# Altium PCB PCB1.PcbDoc
Units mm, origin at the board's own origin, x right, y up, seen from the top; angles counter-clockwise.
Board outline 99.06 x 38.1 mm, 2 copper layers (Top Layer, Bottom Layer); 9 components, 6 nets, 23 pads, 0 vias.
Unrouted connection lines stored in the file: 3.
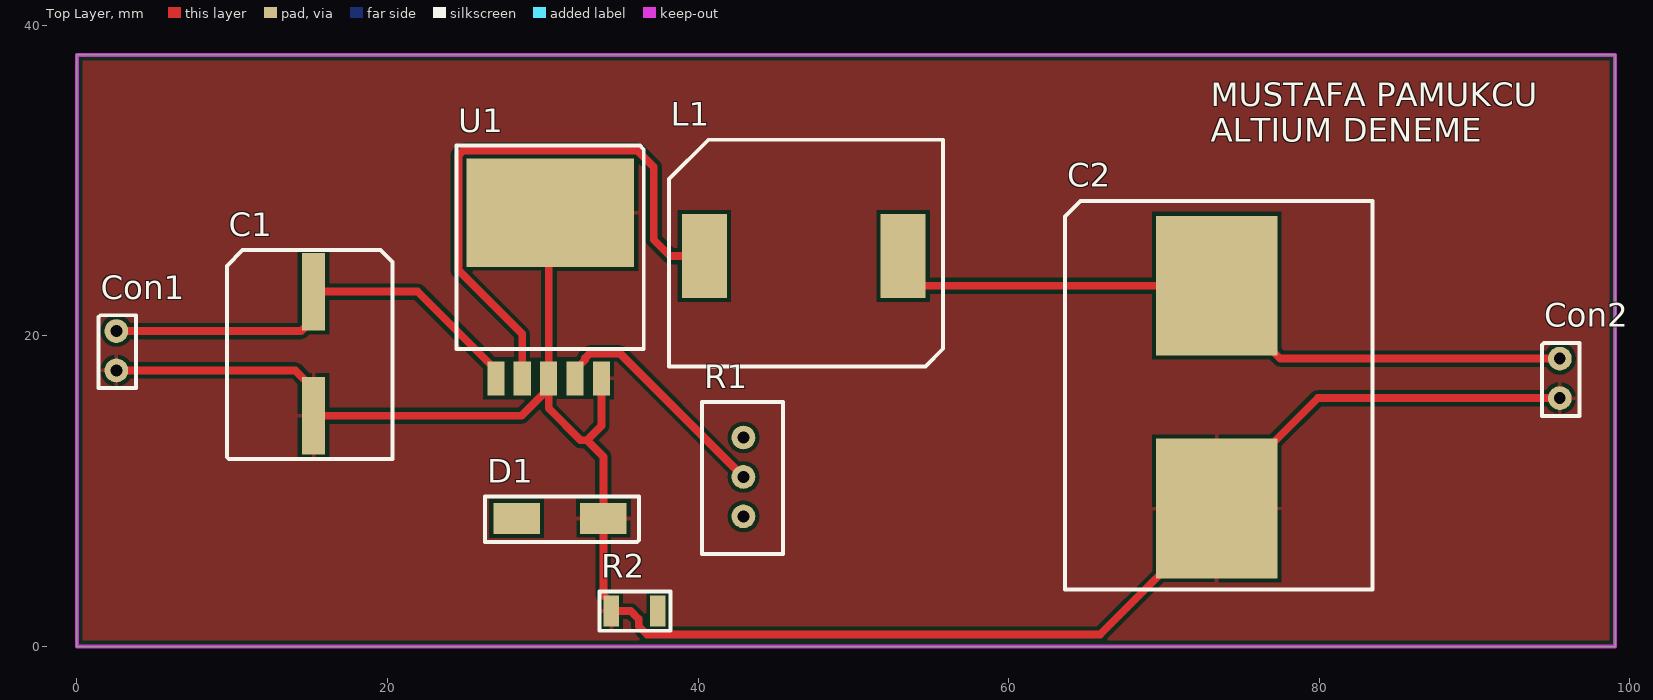
[diagram p0: Top Layer view]
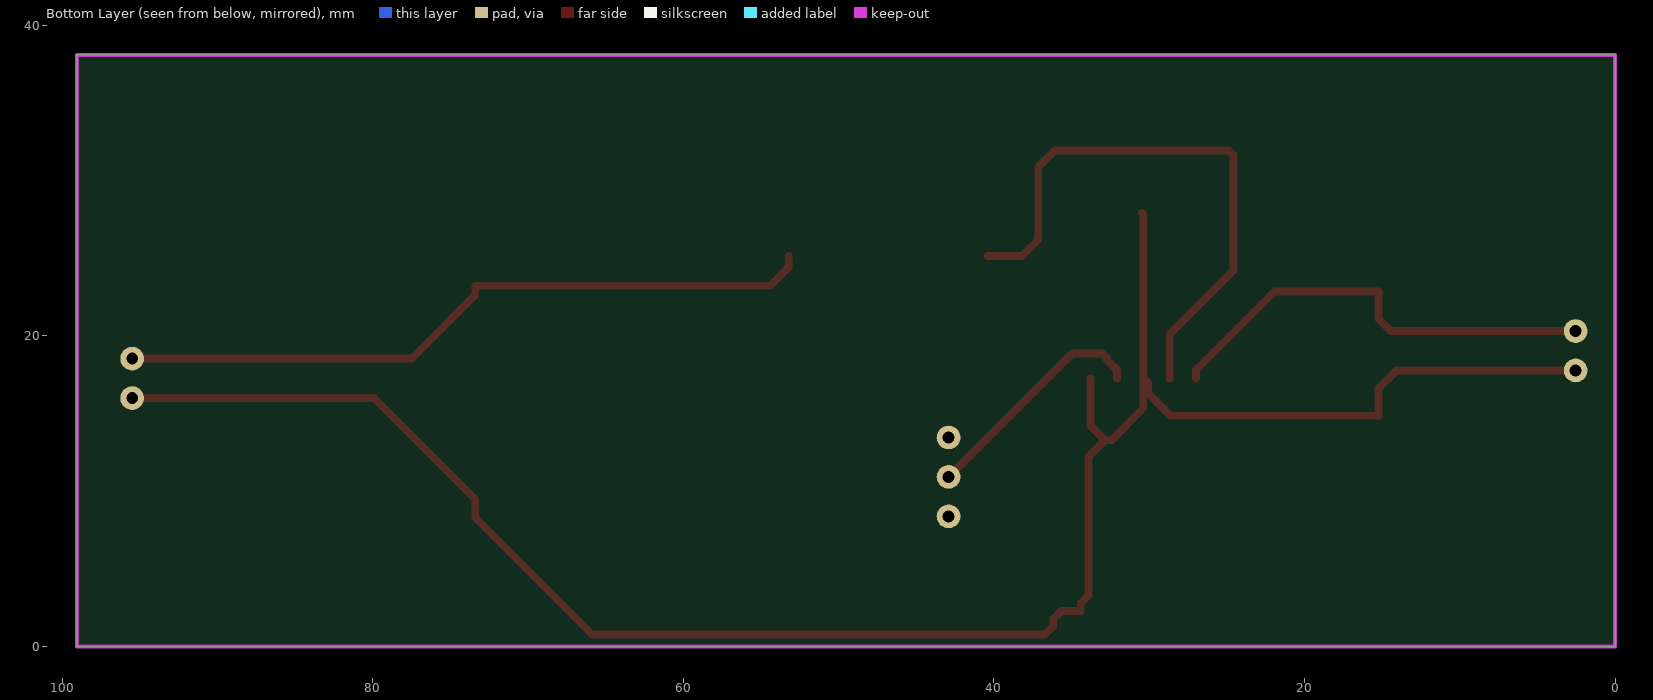
[diagram p1: Bottom Layer view, seen from below]
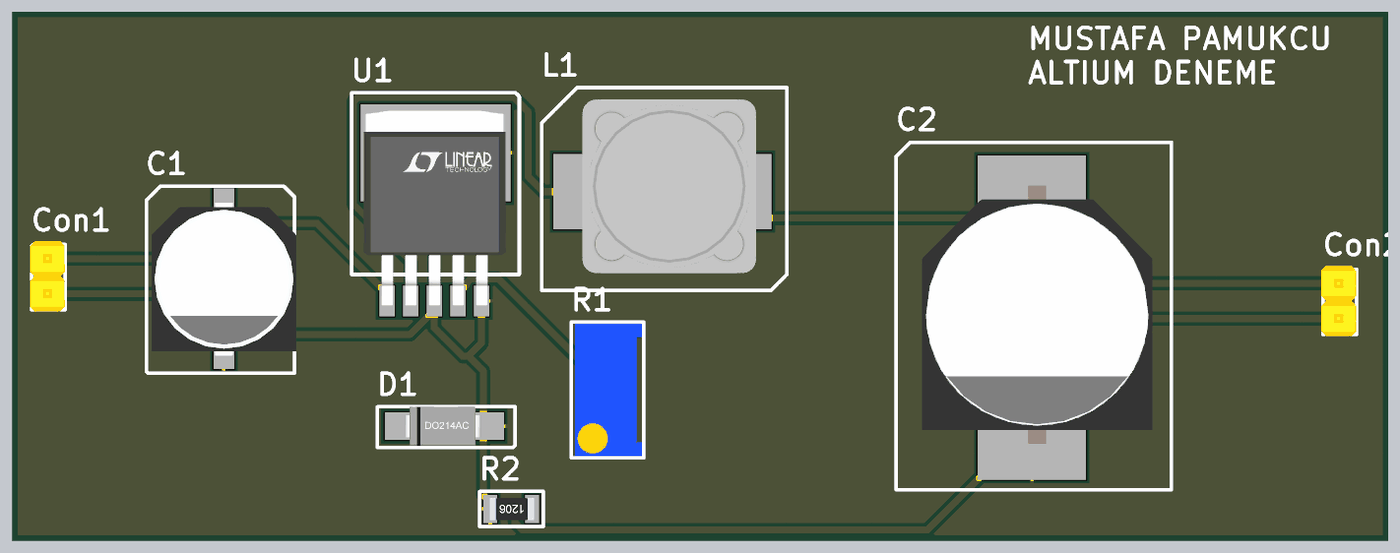
[diagram p2: 3D render of the assembled board from above, using the file's embedded part models]

## Layer stack, top to bottom
Top Solder: solder mask 0.0102, Solder Resist, Dk 3.5
Top Layer: signal copper 0.0356
Dielectric 1: dielectric 0.32, FR-4, Dk 4.8
Bottom Layer: signal copper 0.0356
Bottom Solder: solder mask 0.0102, Solder Resist, Dk 3.5

## Board outline
0,0 0,38.1 99.06,38.1 99.06,0

## Design rules (kind name [scope] priority, off if disabled: settings)
Clearance [All] p1: gap=0.254 ignorepadtopadclearanceinfootprint=FALSE except(0: Arc-Hole Track-Hole SMDPad-Hole THPad-Hole Via-Hole Fill-Hole Poly-Hole Region-Hole Text-Hole)
PolygonConnect [All] p1: connectstyle=Relief reliefconductorwidth=0.254 reliefentries=4 polygonreliefangle="90 Angle" airgapwidth=0.254
RoutingVias [All] p1: holewidth=0.711 width=1.27 viastyle="Through Hole" minholewidth=0.711 minwidth=1.27 maxholewidth=0.711 maxwidth=1.27
SolderMaskExpansion [All] p1: expansion=0.102 istentingtop=FALSE
Width [All] p1: maxlimit=1 minlimit=0.254 preferedwidth=0.5
30 further rules are at their usual default settings.

## Components (designator, comment, footprint, x,y, rotation, side; value= is the part's Value field where it differs from the comment)
C1 "200uF" "220uF Capacitor" 15.24,22.86 r0 top
C2 "1000uF" "1000Uf Cap" 73.406,23.241 r0 top
Con1 "2pinconnector" 2pin 2.54,20.32 r0 top
Con2 "2pinconnector" 2pin 95.504,18.542 r0 top
D1 "1N5822" 1n5822 28.321,8.255 r0 top
L1 "150uH" "150uH Inductor" 40.413,25.146 r0 top
R1 "10K" "10K Pot" 42.926,10.922 r0 top
R2 "1K" "1K 1206 Res" 34.417,2.286 r0 top
U1 "LM2576" LM2576-TO63-5 26.98,17.27 r90 top

## Footprints (in the part's own frame and the unit in brackets; to place one, negate y for a bottom-side part, rotate by r counter-clockwise, add the part's x,y. Pads: shape width x height; smd on the part's side, far side on the other; paste and mask are expansions set on the pad)
"1K 1206 Res" [mm]
  rect 1x2 smd: 1(0,0) 2(3,0)
  silkscreen extent -0.76,-1.27 3.81,1.27, body extent -0.04,-0.8 3.16,0.8, height 0.56
1n5822 [mm]
  rect 3x2 smd: 1(0,0) 2(5.588,0)
  silkscreen extent -2.03,-1.52 7.87,1.4, body extent -0.08,-1.4 5.41,1.4, height 2.3
2pin [mil]
  round 60 hole 30: 1(0,0) 2(0,-100)
  silkscreen extent -45,-145 50,40, body extent -50,-150 50,50, height 374
"10K Pot" [mil]
  round 60 hole 30: 1(0,100) 2(0,0) 3(0,-100)
  silkscreen extent -105,-195 100,190, body extent -94,-190 94,185, height 455
"150uH Inductor" [mm]
  rect 2.9x5.4 smd: 1(0,0) 2(12.8,0)
  silkscreen extent -2.29,-7.11 15.37,7.49, body extent 0.64,-5.87 13.14,6.63, height 7.51
"220uF Capacitor" [mm]
  rect 1.5x5 smd: 1(0,0) 2(0,-8.001)
  silkscreen extent -5.59,-10.79 5.08,2.67, body extent -5.19,-9.53 5.21,1.47, height 10.41
"1000Uf Cap" [mm]
  rect 7.8x9 smd: 1(0,0) 2(0,-14.351)
  silkscreen extent -9.78,-19.56 10.03,5.46, body extent -7.92,-16.26 8.68,2.34, height 17.51
LM2576-TO63-5 [mm] "D2-PAK, 6-Pads, Body 7,42x8,51mm (max), IPC Medium Density"
  rect 2.2x1.1 smd: 1(0,0) 2(0,-1.7) 3(0,-3.4) 4(0,-5.1) 5(0,-6.8)
  rect 7x10.8 smd: 3(10.67,-3.5)
  silkscreen extent 1.91,-9.53 14.99,2.54, body extent -0.33,-8.54 13.72,1.68, height 4.38

## Part data
C1: library part "Electrolytic Cap 220uF"
C2: library part "Electrolytic Cap"
L1: library part "150uH L"
R1: library part "Variable Resistor"
R2: library part Resistor

## Nets (pads, with @x,y where several pads share a name; then routed paths per layer and width w, separated by ;. In a path a pad name is that pad's centre, name@x,y a point inside that pad or via, vN(x,y) a via of type N, cw(c..) or ccw(c..) an arc to the next point about the centre after c; other vN are vias at no path point)
GND: C1.2 C2.2 Con1.2 Con2.2 D1.2 R2.1 U1.3 U1.5 | length 132.4
  Top Layer w0.5: Con1.2 14.069,17.78 15.24,16.609 C1.2 28.632,14.859 30.08,16.307 30.08,16.97 U1.3@30.38,17.27 ; U1.3@30.48,27.94 30.38,27.84 U1.3@30.38,17.27 ; U1.5 33.78,14.222 32.846,13.288 ; Con2.2 79.918,16.002 73.406,9.49 C2.2 73.406,8.29 65.898,0.782 36.708,0.782 36.188,1.303 36.188,1.765 35.667,2.286 R2.1 34.417,2.786 33.909,3.294 D1.2 33.909,12.225 32.846,13.288 ; U1.3@30.38,17.27 30.38,15.34 32.432,13.288 32.846,13.288
NetC1_1: C1.1 Con1.1 U1.1 | length 29.2
  Top Layer w0.5: Con1.1 14.45,20.32 15.24,21.11 C1.1 21.94,22.86 26.98,17.82 U1.1
NetC2_1: C2.1 Con2.1 L1.2 R1.1 | length 45.8
  Top Layer w0.5: L1.2 53.213,24.441 54.413,23.241 C2.1 73.406,22.641 77.505,18.542 Con2.1
NetD1_1: D1.1 L1.1 U1.2 | length 37.6
  Top Layer w0.5: U1.2 28.68,20.127 24.576,24.231 24.576,31.649 24.871,31.944 36.089,31.944 37.151,30.882 37.151,26.208 38.213,25.146 L1.1
NetR1_2: R1.2 U1.4 | length 15.2
  Top Layer w0.5: U1.4 32.08,17.82 32.726,18.466 32.726,18.579 33.021,18.874 34.974,18.874 R1.2
NetR1_3: R1.3 R2.2

## Polygon pours and split planes (outlines as drawn)
GND on Top Layer "GND_L01_P000" (solid, pour order 0): 0,38.1 99.06,38.1 99.06,0 0,0

## Keep-outs
Keep-Out Layer:
  the board outline again, w0.254

## Silkscreen, mask and mechanical layers (free items; w line width, h text height)
Top Overlay:
  text "MUSTAFA PAMUKCU  / ALTIUM DENEME" at 73.025,32.512 h1.52